# EAGLE board Y-babies ATtiny84 v06 (EAGLE 6.5.0)
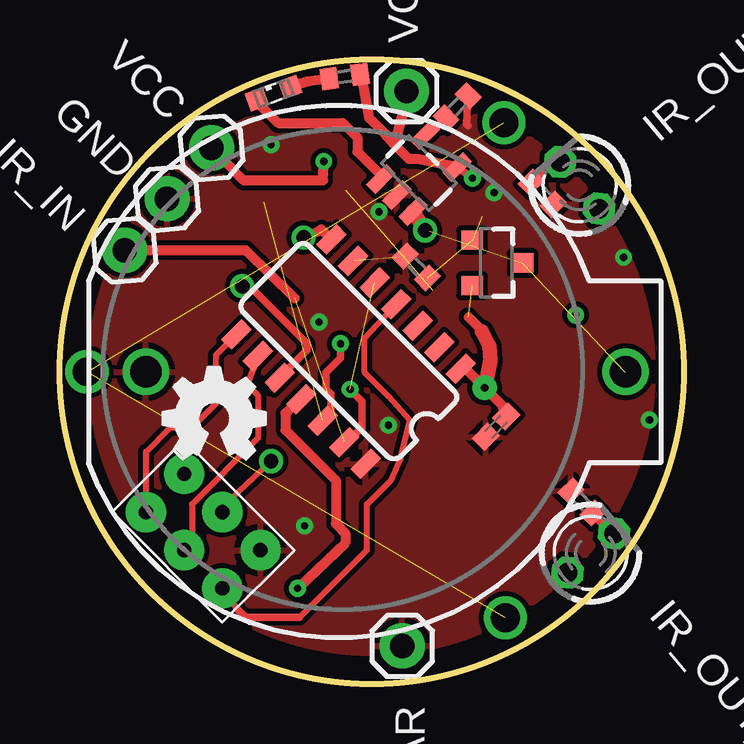
[diagram p0: board, top side]
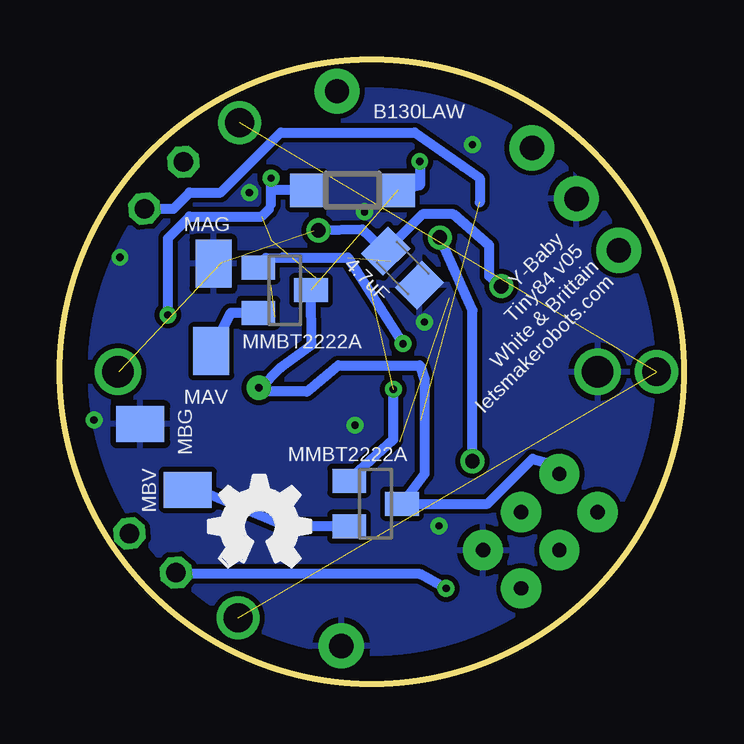
[diagram p1: board, bottom side, seen from below]

Size 26 x 26 mm. Coordinates in mm from the lower left corner, seen from the top.
Outline: circle at 13,13 radius 13
Copper layers (1*16): Top 0.035mm / dielectric 1.5mm / Bottom 0.035mm
Design rules "default": minimum track width 10mil, minimum drill 24mil, track to track 8mil, track to pad 8mil, pad to pad 8mil, via to via 8mil, smd to smd 8mil, copper to edge 40mil, drill to drill 8mil, minimum pad ring 10mil, minimum via ring 8mil, stop-mask expansion 4mil, vias tented up to drill 0mil, thermal gap 10mil

## Footprints (pad centres in the part's own frame; a part is rotated, then mirrored left to right if it is on the bottom)
BATTCOM_20MM_PTH = drill 1.3: 1 11.85,0; 2 -8.15,0
C0402K = smd 0.925 x 0.74: 1 -0.6,0; 2 0.6,0
C0805K = smd 1.3 x 1.6: 1 -1,0; 2 1,0
SOD123 = smd 1.4 x 1.4: A 1.9,0; C -1.9,0
SOT23-3 = smd 0.8 x 0.9: 1 -0.95,-1; 2 0.95,-1; 3 0,1.1
1X01 = drill 1.016 pad 1.88: 1 0,0
LED3MM = drill 0.813 octagon: A -1.27,0; K 1.27,0
SML0603 = smd 0.8 x 0.8: A 0.75,0; C -0.75,0
SOT23 = smd 1 x 1.4: 1 -0.95,-1.1; 2 0.95,-1.1; 3 0,1.1
PAD-1.5X4.5 = smd 1.5 x 2: P$1 0,0
R0402 = smd 0.7 x 0.9: 1 -0.65,0; 2 0.65,0
SOT23-5 = smd 0.55 x 1.2: 1 -0.95,-1.3; 2 0,-1.3; 3 0.95,-1.3; 4 0.95,1.3; 5 -0.95,1.3
SO14 = smd 0.6 x 1.2: 1 -3.81,-2.8; 2 -2.54,-2.8; 3 -1.27,-2.8; 4 0,-2.8; 5 1.27,-2.8; 6 2.54,-2.8; 7 3.81,-2.8; 8 3.81,2.8; 9 2.54,2.8; 10 1.27,2.8; 11 0,2.8; 12 -1.27,2.8; 13 -2.54,2.8; 14 -3.81,2.8
POGO_PIN_SPI_PAD = drill 0.6 pad 1.676: GND 1,-1; MISO 3.25,-5.5; MOSI 1,-3.25; RST 3.25,-1; SCK 3.25,-3.25; VCC 1,-5.5

## Placement (x,y rotation side)
BAT1  LIR2032  [BATTCOM_20MM_PTH]  11.73,13 0 top
C1  1uF  [C0402K]  18.18,10.71 225 top
C2  4.7uF  [C0805K]  11.71,17.32 315 bottom
D1  B130LAW  [SOD123]  13.8,20.57 180 bottom
DMP1045U  MOSFET-PCHANNELSMD  [SOT23-3]  18.19,17.54 270 top
GND  M01PTH  [1X01]  4.46,20.22 5 top
GND_BAR  M01PTH  [1X01]  14.27,1.57 0 top
IR_IN  M01PTH  [1X01]  2.7,18.06 5 top
IR_OUT_A  [LED3MM]  22.13,5.44 40 top
IR_OUT_B  [LED3MM]  21.67,20.77 130 top
LED1  [SML0603]  8.91,24.62 20 top
MMBT2222A_L  [SOT23]  12.84,7.5 270 bottom
MMBT2222A_R  [SOT23]  16.63,16.4 270 bottom
MOT_1_A  M01SMD-4.5X1.5  [PAD-1.5X4.5]  22.65,10.82 270 bottom
MOT_1_B  M01SMD-4.5X1.5  [PAD-1.5X4.5]  20.67,8.08 270 bottom
MOT_2_A  M01SMD-4.5X1.5  [PAD-1.5X4.5]  19.69,13.86 0 bottom
MOT_2_B  M01SMD-4.5X1.5  [PAD-1.5X4.5]  19.6,17.51 0 bottom
R1  330  [R0402]  21.77,7.57 135 top
R2  330  [R0402]  20.11,20.44 315 top
R3  330  [R0402]  11.87,25.31 8 top
R4  60k  [R0402]  16.56,24.05 45 top
R5  100k  [R0402]  14.86,17.37 135 top
U1  MCP73831  [SOT23-5]  14.97,21.28 315 top
U$1  ATTINY84  [SO14]  12.04,13.84 135 top
U$2  POGO_PIN_SPI_PAD  [POGO_PIN_SPI_PAD]  9.77,5.56 225 top
U$3  [OSHW_FILLX150_NOTEXT]  4.3,9.37 0 top
U$4  [OSHW_FILLX150_NOTEXT]  19.8,4.87 0 bottom
VCC  M01PTH  [1X01]  6.32,22.33 5 top
VCC_BAR  M01PTH  [1X01]  14.45,24.7 0 top

## Library data of the parts
BAT1 = SparkFun-Electromechanical
C1 C2 R1-R5 = resistor
D1 = diode
DMP1045U = SparkFun-DiscreteSemi
GND GND_BAR IR_IN MMBT2222A_L MMBT2222A_R MOT_1_A MOT_1_B MOT_2_A MOT_2_B VCC VCC_BAR = SparkFun
IR_OUT_A IR_OUT_B LED1 = led
U1 = SparkFun-PowerIC; PROD_ID: IC-09995
U$1 = SparkFun-DigitalIC
U$2 = Random parts
U$3 U$4 = ohw-logo

## Nets
5V: D1.A DMP1045U.1 R3.2 R5.1 U1.4 VCC_BAR.1
GND: BAT1.2 C1.2 C2.2 GND.1 GND_BAR.1 MOT_1_A.P$1 MOT_2_B.P$1 R1.2 R2.2 R4.2 R5.2 U1.2 U$1.14 U$2.GND
IR_IN: IR_IN.1 U$1.13
IR_OUT_A: IR_OUT_A.A U$1.11
IR_OUT_B: IR_OUT_B.A U$1.12
M_A_IN: MMBT2222A_R.2 MOT_2_A.P$1
M_A_SIG: MMBT2222A_R.1 U$1.6
MISO: U$1.8 U$2.MISO
MOSI: U$1.7 U$2.MOSI
MOT_B_IN: MMBT2222A_L.2 MOT_1_B.P$1
MOT_B_SIG: MMBT2222A_L.1 U$1.5
N$1: LED1.C U1.1
N$2: LED1.A R3.1
N$7: IR_OUT_A.K R1.1
N$8: IR_OUT_B.K R2.1
N$10: R4.1 U1.5
RES: U$1.4 U$2.RST
SCK: U$1.9 U$2.SCK
VBAT: BAT1.1 C2.1 DMP1045U.3 U1.3 U$1.10
VCC: C1.1 D1.C DMP1045U.2 MMBT2222A_L.3 MMBT2222A_R.3 U$1.1 U$2.VCC VCC.1

## Tracks (layer width: path | path; a pad name or v marks a point on that pad's centre or on a via)
5V  (via drill 0.3)  (2 unrouted)
  Top 0.305: 14.3,23.75 VCC_BAR.1 | v17.2,21.07 16.8,21.37 U1.4
  Top 0.406: U1.4 14.9,21.87 14.55,21.87 13.95,22.47 | 13.95,22.47 14.3,23.75 | 13.95,22.47 13.55,22.92 12.9,23.57 12.6,25.29 R3.2
  Bottom 0.305: 17.3,19.77 17.2,19.97
  Bottom 0.406: v21.5,15.37 21.5,18.57 20.6,19.47 17.6,19.47 17.3,19.77 | 17.2,19.97 17.2,20.57 | D1.A 17.2,20.57 | 17.2,20.57 v17.2,21.07
GND  (via drill 0.3)
  Top 0.305: R4.2 16.95,23.32 17,23.27
  other vias: 24.58,10.99 10.2,6.57 18.1,20.47 8.8,22.47 10.8,15.07 13.7,10.77 13.3,19.67 23.5,17.77
  pour Top: -0.97,-0.97 26.97,-0.97 26.97,26.97 -0.97,26.97
  pour Bottom: -0.97,-0.97 26.97,-0.97 26.97,26.97 -0.97,26.97
IR_IN  (1 unrouted)
  Top 0.406: IR_IN.1 7.75,18.06 9.79,16.07
IR_OUT_A  (via drill 0.3)
  Top 0.406: U$1.11 9.99,11.86 9.4,11.27 9.4,10.57 11.5,8.47 11.5,6.67 11.9,6.27 11.9,5.87 v9.9,3.97
  Bottom 0.406: v9.9,3.97 11,4.57 21.1,4.57 IR_OUT_A.A
IR_OUT_B  (1 unrouted)
  Bottom 0.406: IR_OUT_B.A 21.27,19.8 20.6,20.47 19.3,20.47 16.8,22.97 11.2,22.97 9.2,21.57 8.5,21.07 8.5,20.07
LEG2  (via drill 1.2)  (2 unrouted)
  other vias: 1.13,13 18.52,23.38 18.57,2.74
M_A_IN
  Bottom 0.406: MMBT2222A_R.2 18.88,15.45 MOT_2_A.P$1
M_A_SIG  (via drill 0.3)  (1 unrouted)
  Top 0.305: v11.7,14.17 11.7,13.57 11.1,12.97 11.1,12.27 11.3,12.07 11.3,11.31
  Bottom 0.406: MMBT2222A_R.1 17.42,17.75 16.7,17.77 14,17.77 v11.7,14.17
MISO
  Top 0.254: U$2.MISO 3.59,9.66 4.6,10.67 5.5,10.67 6.5,11.67 6.5,13.69 U$1.8
MOSI  (via drill 0.6)
  Top 0.254: U$2.MOSI 6.77,7.34 v8.8,9.27
  Top 0.406: v10.16,18.6 10.9,18.93 U$1.7
  Bottom 0.406: v8.8,9.27 8.8,15.57 v10.16,18.6
MOT_B_IN
  Bottom 0.305: 20.56,7.87 MOT_1_B.P$1
  Bottom 0.406: MMBT2222A_L.2 16.58,6.55 20.5,8.17 20.56,7.87
MOT_B_SIG  (via drill 0.3)  (1 unrouted)
  Top 0.305: 11.99,10.06 12.6,10.67 12.6,11.77 v12.1,12.27
  Bottom 0.305: MMBT2222A_L.1 13.98,8.45
  Bottom 0.406: 13.98,8.45 12.1,10.17 v12.1,12.27
N$1
  Top 0.305: U1.1 13.38,21.19
  Top 0.406: 13.38,21.19 12.4,22.17 12.4,22.77 11.8,23.37 9.1,23.37 8.41,24.06 LED1.C
N$2
  Top 0.406: R3.1 10.32,25.1 LED1.A
N$7
  Top 0.406: IR_OUT_A.K 23.08,6.26 R1.1
N$8
  Top 0.305: IR_OUT_B.K 20.49,21.75 R2.1
N$10
  Top 0.305: U1.5 15.39,22.87 R4.1
RES
  Top 0.254: U$2.RST 7.37,3.14 | 9.98,2.77 11.6,4.37 12.8,5.57 12.8,7.47 13.8,8.47 14.2,9.37 14.6,10.97 13.7,11.97 12.7,12.97 12.7,14.41 U$1.4
  Top 0.305: 9.98,2.77 7.74,2.77 7.37,3.14
SCK
  Top 0.254: U$1.9 7.8,12.47 8.26,12.01 8.26,10.23 5.5,7.47 5.5,5.88 U$2.SCK
VBAT  (via drill 0.6)  (2 unrouted)
  Top 0.305: U$1.10 10.3,13.9 10.3,14.17 7.9,16.57 v7.6,16.57
  Top 0.406: 15.4,18.87 v15.22,18.89
  Top 0.61: BAT1.1 23.54,13 | U1.3 v15.22,18.89
  Bottom 0.406: v7.6,16.57 8.1,16.97 8.1,18.27 9.6,19.57 10.88,19.57 C2.1 13.39,18.93 v15.22,18.89
VCC  (via drill 0.3 pad 0.3, 0.3 pad 1.02)  (2 unrouted)
  Top 0.305: U$1.1 16.74,13.13
  Top 0.406: VCC.1 7.66,20.97 10.97,20.97 10.97,21.24 v11,21.77 | C1.1 18.44,11.6 v17.71,12.33 16.91,13.13 U$1.1 | 17.6,14.67 17.6,14.72 17.04,15.28
  Top 0.61: 17.6,14.67 17.9,14.07 17.95,13.47 v17.71,12.33
  Bottom 0.406: MMBT2222A_R.3 15.51,14.12 16.8,13.17 17.64,12.33 v17.71,12.33 17.55,12.17 15.7,12.17 14.4,13.27 11,13.27 10.8,12.67 10.8,8.74 MMBT2222A_L.3 8.17,7.5 6.3,9.37 5.61,9.17 U$2.VCC | v11,21.77 11,20.77 D1.C

## Text on the board
_tsilk: LEG3 | 330 | 60k | 330 | DMP1045U | MCP73831 | GND_BAT | VBAT | LEG2 | 1uF | Y-Baby / Tiny84 v05 / White & Brittain / letsmakerobots.com | 330 | LEG1
_bsilk: B130LAW | MAG | Y-Baby / Tiny84 v05 / White & Brittain / letsmakerobots.com | 4.7uF | MMBT2222A | MAV | MBG | MMBT2222A | MBV